# Altium PCB Probe.PcbDoc (part 1 of 2)
Units mil, origin at the board's own origin, x right, y up, seen from the top; angles counter-clockwise.
Board outline 2992.13 x 787.4 mil, 4 copper layers (Top, Ground, Signal/Power, Bottom), stack 59.68 mil thick; 57 components, 32 nets, 157 pads, 214 vias.
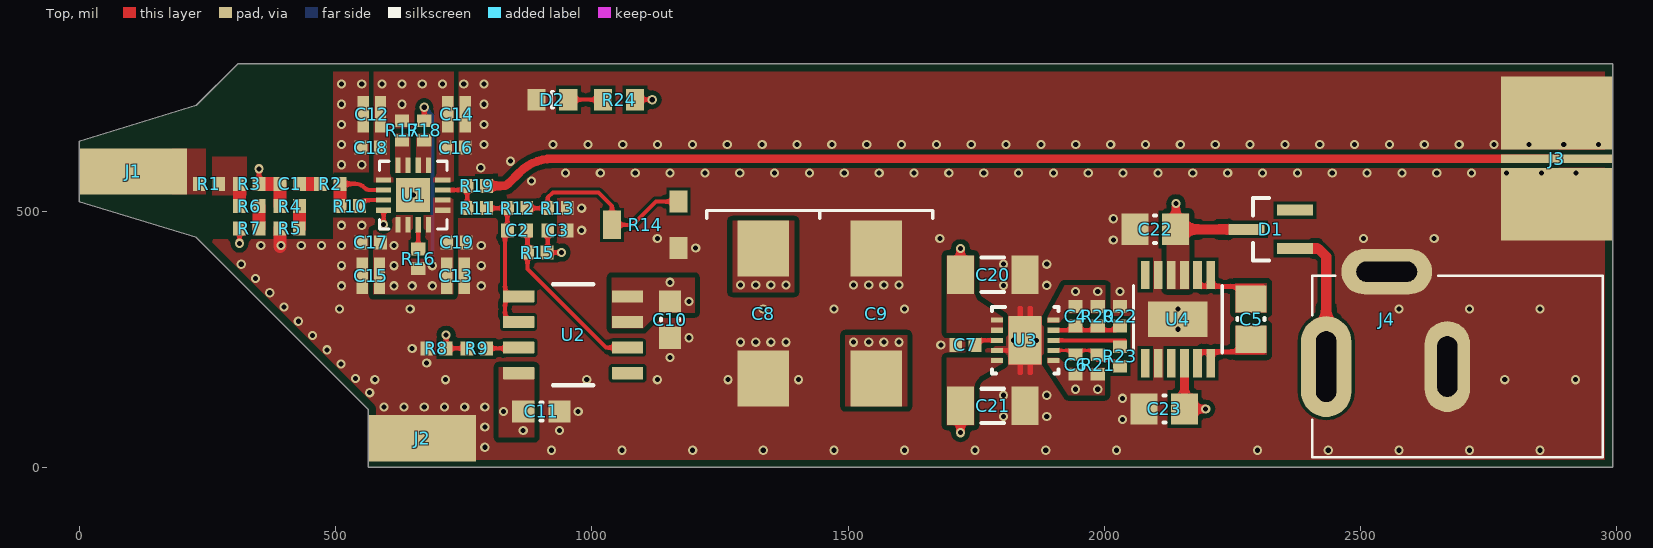
[diagram p0: Top view]
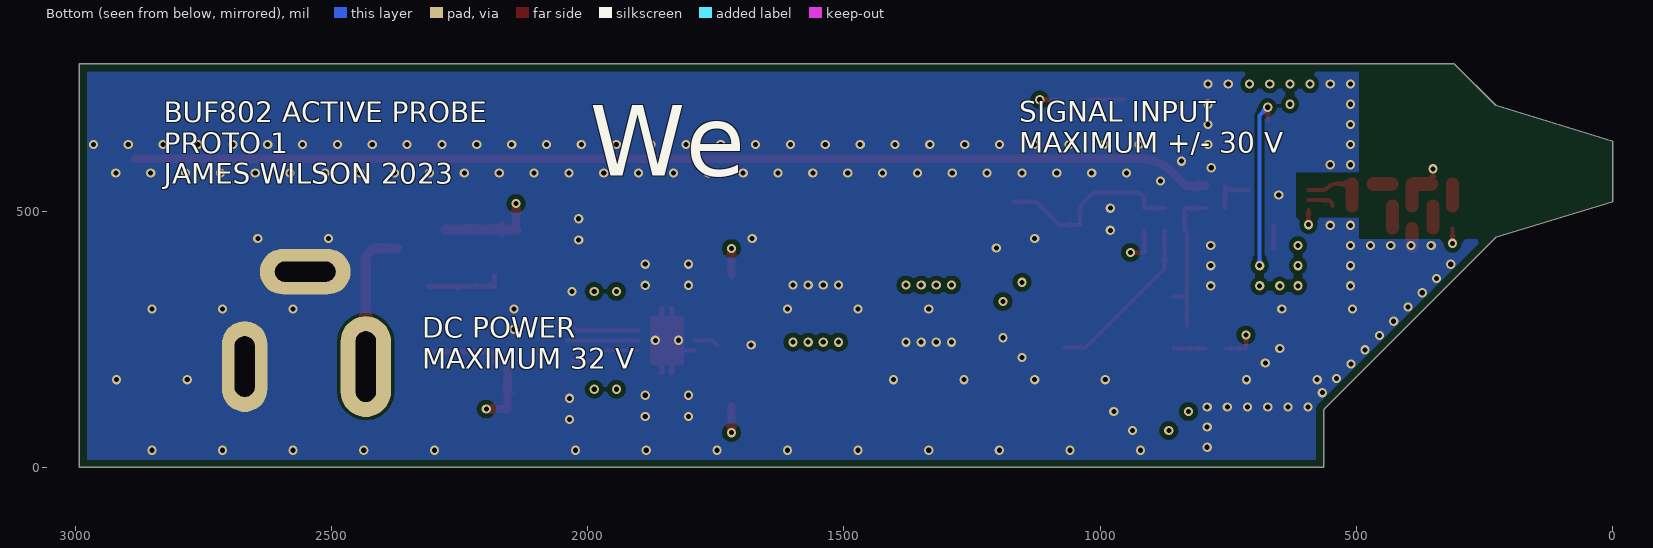
[diagram p1: Bottom view, seen from below]
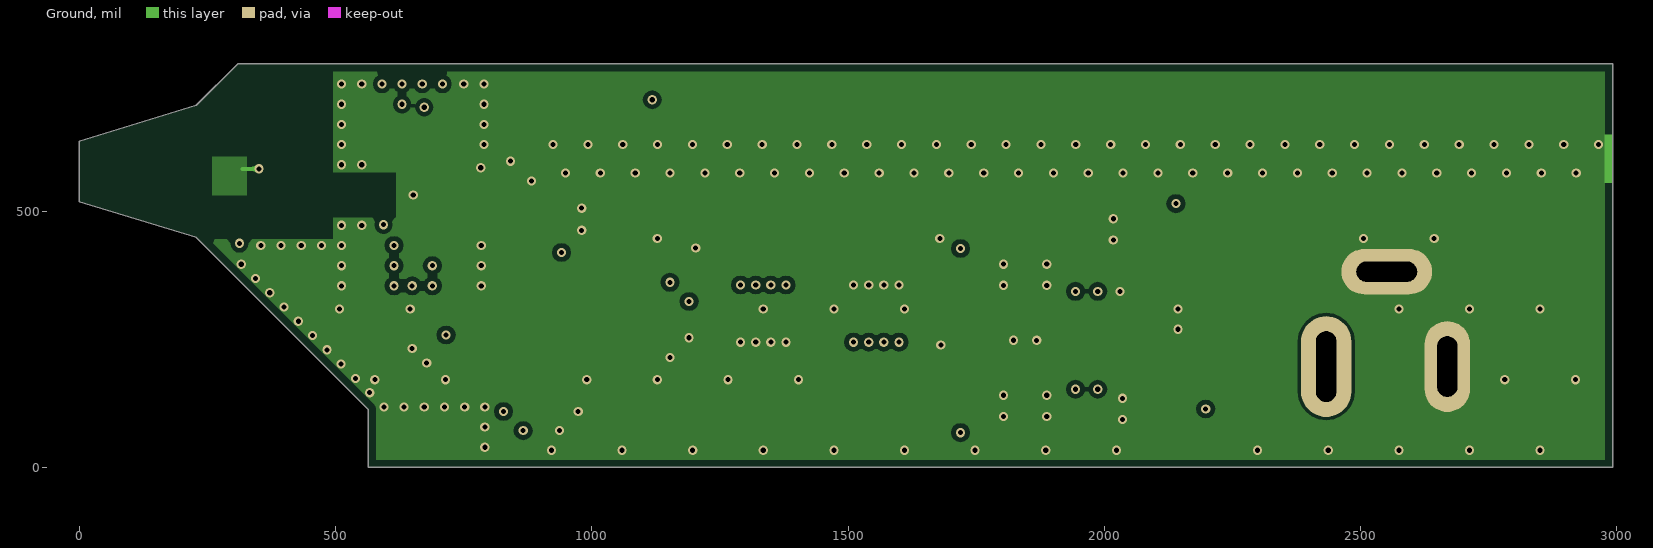
[diagram p2: Ground]
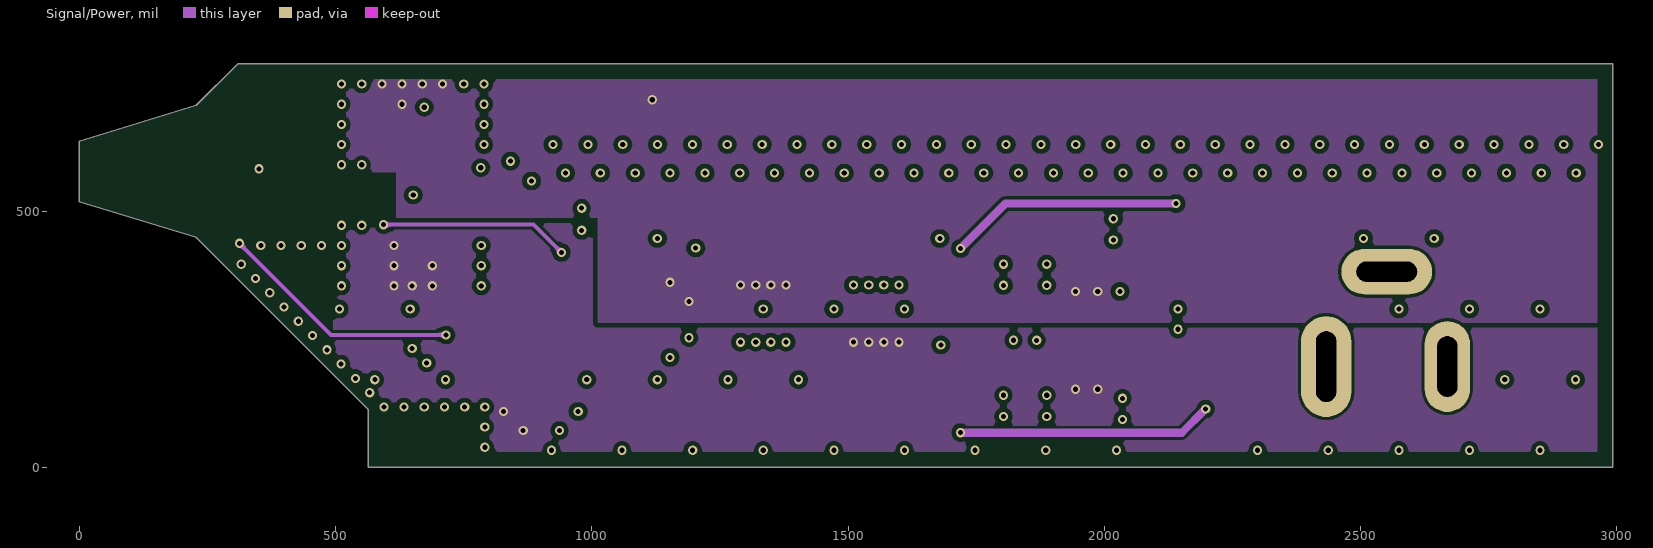
[diagram p3: Signal/Power]
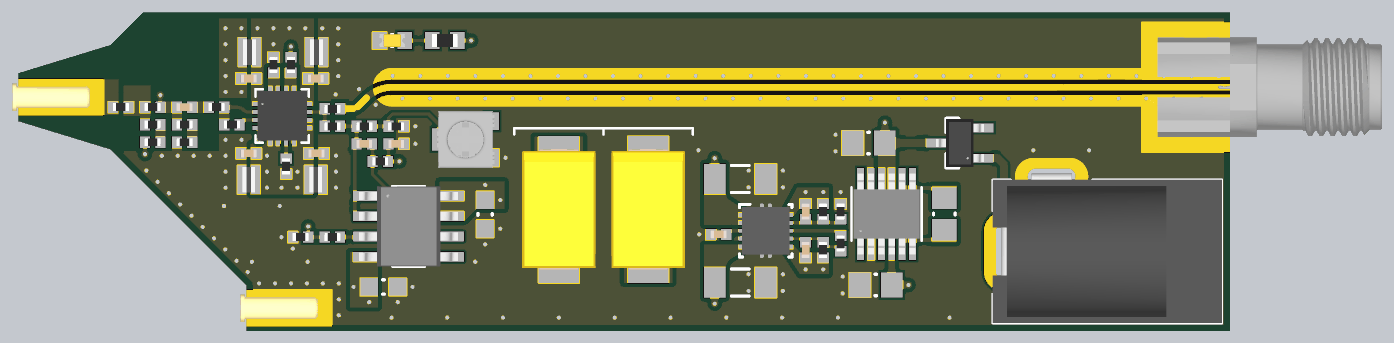
[diagram p4: 3D render of the assembled board from above, using the file's embedded part models]

## Layer stack, top to bottom
Top Solder: solder mask 1, Solder Resist, Dk 3.5
Top: signal copper 1.7
Dielectric 1: core 7.96, FR-4, Dk 3.68
Ground: signal copper 0.68
Dielectric 3: core 39, Dk 3.68
Signal/Power: signal copper 0.68
Dielectric 4: prepreg 7.96, Dk 3.68
Bottom: signal copper 1.7
Bottom Solder: solder mask 1, Solder Resist, Dk 3.5

## Board outline
0,518.7 0,636.81 228.35,706.69 309.06,787.4 2992.13,787.4 2992.13,0 563.98,0 563.98,113.19 228.35,448.82

## Design rules (kind name [scope] priority, off if disabled: settings)
BoardOutlineClearance BoardOutlineClearance_outer [OnCopper and OnOutside] p1: gap=15 ignorepadtopadclearanceinfootprint=FALSE except(0: SMDPad-OutlineEdge)
BoardOutlineClearance BoardOutlineClearance_L3 [OnLayer('Signal/Power')] p2: gap=30 ignorepadtopadclearanceinfootprint=FALSE
BoardOutlineClearance BoardOutlineClearance_inner [OnCopper and not OnOutside] p3: gap=15 ignorepadtopadclearanceinfootprint=FALSE except(0: Fill-OutlineEdge Region-OutlineEdge)
Clearance Clearance_RF_CPWG [InNet('NetJ3_1') vs InNet('GND')] p1: gap=6 ignorepadtopadclearanceinfootprint=FALSE except(10: Arc-Fill Arc-Poly Arc-Region Track-Fill Track-Poly Track-Region SMDPad-Fill SMDPad-Poly SMDPad-Region Fill-Fill Fill-Poly Fill-Region Poly-Poly Poly-Region Region-Region)
Clearance [All] p2: gap=6 ignorepadtopadclearanceinfootprint=FALSE except(10: Fill-Fill Fill-Poly Fill-Region Poly-Poly Poly-Region Region-Region; 13: Arc-Hole Track-Hole SMDPad-Hole THPad-Hole Via-Hole Fill-Hole Poly-Hole Region-Hole)
HoleSize [All] p1: absolutevalues=TRUE maxlimit=250 minlimit=10 maxpercent=80.000 minpercent=20.000
MinimumAnnularRing [All] p1: minimumring=4
MinimumSolderMaskSliver [All] p1: minsoldermaskwidth=4
PlaneConnect [All] p1: planeconnectstyle=Direct reliefexpansion=20 reliefentries=4 reliefconductorwidth=10 reliefairgap=10
PolygonConnect [All] p1: connectstyle=Direct reliefconductorwidth=10 reliefentries=4 polygonreliefangle="90 Angle" airgapwidth=10
RoutingVias [All] p1: holewidth=18 width=18 viastyle="Through Hole" minholewidth=8 minwidth=18 maxholewidth=28 maxwidth=50
SilkToSolderMaskClearance [IsPad] p1: minsilkscreentomaskgap=5 clearancetoexposedcopper=TRUE
SolderMaskExpansion [All] p1: expansion=2
Width [All] p1: maxlimit=200 minlimit=4 preferedwidth=10
26 further rules are at their usual default settings.

## Classes and differential pairs
component class Power: C4 C5 C6 C7 C8 C9 C10 C11 C12 C13 C14 C15 C16 C17 C18 C19 C20 C21 C22 C23 C? D1 D2 J4 R20 R21 R22 R23 R24 R? U3 U4 U?
component class Probe: C1 C2 C3 J1 J2 J3 R1 R2 R3 R4 R5 R6 R7 R8 R9 R10 R11 R12 R13 R14 R15 R16 R17 R18 R19 U1 U2

## Components (designator, comment, footprint, x,y, rotation, side; value= is the part's Value field where it differs from the comment)
C1 "330p" CAPC0402(1005)50_M 410.45,553.15 r0 top
C2 "100p" CAPC0402(1005)50_M 854.33,462.6 r0 top
C3 "100p" CAPC0402(1005)50_M 933.07,462.6 r0 top
C4 "10n" CAPC0402(1005)50_M 1943.9,295.28 r90 top
C5 "1u" CAPC0805(2012)145_M 2286.42,289.37 r270 top
C6 "10n" CAPC0402(1005)50_M 1943.9,200.79 r270 top
C7 "10n" CAPC0402(1005)50_M 1729.04,239.17 r180 top
C8 "22u" "KEMET D_M" 1334.65,300.2 r90 top
C9 "22u" "KEMET D_M" 1555.12,300.2 r90 top
C10 "100n" CAPC0603(1608)100_M 1152.56,288.39 r270 top
C11 "100n" CAPC0603(1608)100_M 901.57,109.25 r180 top
C12 "100n LICC" CAPC0306_M 570.87,688.98 r180 top
C13 "100n LICC" CAPC0306_M 734.25,374.02 r180 top
C14 "100n LICC" CAPC0306_M 736.22,688.98 r0 top
C15 "100n LICC" CAPC0306_M 568.9,374.02 r0 top
C16 "10n" CAPC0402(1005)50_M 734.25,624.02 r0 top
C17 "10n" CAPC0402(1005)50_M 568.9,438.98 r0 top
C18 "10n" CAPC0402(1005)50_M 568.9,624.02 r180 top
C19 "10n" CAPC0402(1005)50_M 736.22,438.98 r180 top
C20 "10u" CAPC1206(3216)170_M 1782.48,375.98 r0 top
C21 "10u" CAPC1206(3216)170_M 1782.48,120.08 r180 top
C22 "4.7u" CAPC0805(2012)100_M 2099.41,464.57 r180 top
C23 "4.7u" CAPC0805(2012)100_M 2117.13,114.17 r180 top
D1 "BAT54" INF-PG-SC59_M 2324.8,464.57 r180 top
D2 "VLMTG1300-GS08" LED0603(1608)_M 923.23,717.52 r0 top
J1 "0339-0-15-01-15-27-10-0" "MILL-MAX 0339" 0.31,577.76 r0 top
J2 "0339-0-15-01-15-27-10-0" "MILL-MAX 0339" 563.98,57.09 r0 top
J3 "901-10511-3" 901-10511-3 2992.13,602.36 r180 top
J4 "2.1/5.5mm" "CUI PJ-002A" 2433.07,196.85 r0 top
R1 "82" RESC0402(1005)_M 253.15,553.15 r0 top
R2 "100" RESC0402(1005)_M 489.57,553.15 r0 top
R3 "1.60M" RESC0402(1005)_M 331.69,553.15 r0 top
R4 "200K" RESC0402(1005)_M 410.45,509.84 r0 top
R5 "200K" RESC0402(1005)_M 410.43,466.54 r180 top
R6 "976K" RESC0402(1005)_M 331.69,509.84 r0 top
R7 "953K" RESC0402(1005)_M 331.69,466.54 r180 top
R8 "66.5k" RESC0402(1005)_M 696.85,232.28 r180 top value=66.5K
R9 "68" RESC0402(1005)_M 775.59,232.28 r0 top
R10 "10.0M" RESC0402(1005)_M 527.56,509.84 r0 top
R11 "51.0K" RESC0402(1005)_M 775.59,505.91 r180 top
R12 "10.0K" RESC0402(1005)_M 854.33,505.91 r0 top
R13 "390" RESC0402(1005)_M 933.07,505.91 r0 top
R14 "1k" PVG3A 1104.33,473.43 r90 top
R15 "2.00K" RESC0402(1005)_M 893.7,419.29 r180 top
R16 "17.8k" RESC0402(1005)_M 661.42,407.18 r270 top value=17.8K
R17 "1.00K" RESC0402(1005)_M 629.92,657.48 r90 top
R18 "1.00K" RESC0402(1005)_M 673.23,657.48 r90 top
R19 "49.9" RESC0402(1005)_M 775.59,549.21 r0 top
R20 "41.2k" RESC0402(1005)_M 1987.2,295.28 r270 top value=41.2K
R21 "91.0K" RESC0402(1005)_M 1987.2,200.79 r270 top
R22 "10.2k" RESC0402(1005)_M 2030.51,295.28 r90 top value=10.2K
R23 "18.0K" RESC0402(1005)_M 2030.51,216.54 r90 top
R24 "3.00K" RESC0603(1608)_M 1053.15,717.52 r180 top
U1 "BUF802" "VQFN16_RGT_TEX- OSHPARK" 651.57,531.49 r0 top
U2 "ADA4625" SOIC-8 963.58,258.86 r0 top
U3 "TPS7A39" DSC0010J_NV 1845.47,248.03 r0 top
U4 "LTC3261" MSOP-12_MSE 2143.7,289.37 r90 top

## Footprints (in the part's own frame and the unit in brackets; to place one, negate y for a bottom-side part, rotate by r counter-clockwise, add the part's x,y. Pads: shape width x height; smd on the part's side, far side on the other; paste and mask are expansions set on the pad)
901-10511-3 [mil] "901-10511-3"
  rect 218x16 smd paste-1000: 1(109,0)
  rect 218x142 smd paste-1000: 2(109,89) 2(109,-89)
  body extent -375,-124 179,124, height 127
CAPC0306_M [mm] "CAPC0306(0510)_M"
  rect 0.56x1.81 smd: 1(-0.43,0) 2(0.43,0)
  body extent -0.4,-0.8 0.4,0.8, height 0.55
CAPC0402(1005)50_M [mm] "Chip Capacitor, Body 1.0x0.5mm, Height 0.5mm, IPC Low  Density"
  rect 0.635x0.7 smd: 1(-0.483,0) 2(0.483,0)
  body extent -0.5,-0.25 0.5,0.25, height 0.5
CAPC0603(1608)100_M [mm] "Chip Capacitor, Body 1.6x0.8mm, Height 1.0mm, IPC Low Density"
  rect 1.1x1.1 smd: 1(-0.9,0) 2(0.9,0)
  silkscreen extent -0.05,-0.45 0.05,0.45, body extent -0.87,-0.48 0.88,0.48, height 1
CAPC0805(2012)100_M [mm] "Chip Capacitor, Body 2.0x1.2mm, Height 1.0mm, IPC Low Density"
  rect 1.35x1.55 smd: 1(-1,0) 2(1,0)
  silkscreen extent -0.05,-0.67 0.05,0.67, body extent -1.1,-0.73 1.1,0.73, height 1
CAPC0805(2012)145_M [mm] "Chip Capacitor, Body 2.0x1.2mm, Height 1.45mm, IPC Low Density"
  rect 1.35x1.55 smd: 1(-1,0) 2(1,0)
  silkscreen extent -0.05,-0.67 0.05,0.67, body extent -1.1,-0.72 1.1,0.72, height 1.45
CAPC1206(3216)170_M [mm] "Chip Capacitor, Body 3.2x1.6mm, Height 1.7mm, IPC Low Density"
  rect 1.35x1.9 smd: 1(-1.6,0) 2(1.6,0)
  silkscreen extent -0.55,-0.85 0.55,0.85, body extent -1.7,-0.9 1.7,0.9, height 1.7
"CUI PJ-002A" [mm] "CUI PJ-002A 2.1/5.5mm barrel jack"
  oval 2.5x5 hole 1 slot 3.5 at 90 deg: 1(0,0)
  oval 2.25x4.5 hole 1 slot 3 at 90 deg: 2(6,0)
  oval 4.5x2.25 hole 1 slot 3 at 0 deg: 3(3,4.7)
  silkscreen extent -0.7,-4.5 13.7,4.5, body extent -0.7,-4.5 13.7,4.9, height 11
DSC0010J_NV [mm]
  rect 0.6x0.25 smd: 1(-1.4,1) 2(-1.4,0.5) 3(-1.4,0) 4(-1.4,-0.5) 5(-1.4,-1) 6(1.4,-1) 7(1.4,-0.5) 8(1.4,0) 9(1.4,0.5) 10(1.4,1)
  rect 1.65x2.4 smd paste-1.187 mask-1.181: 11(0,0)
  Top region: -0.325,-1.7 -0.375,-1.65 -0.375,-1.2 -0.775,-1.2 -0.825,-1.15 -0.825,1.15 -0.775,1.2 -0.375,1.2 -0.375,1.65 -0.325,1.7 -0.325,1.7 -0.175,1.7 -0.175,1.7 -0.125,1.65 -0.125,1.2 0.125,1.2 0.125,1.65 0.175,1.7 0.175,1.7 0.325,1.7 0.325,1.7 0.375,1.65 0.375,1.2 0.775,1.2 0.825,1.15 0.825,-1.15 0.775,-1.2 0.375,-1.2 0.375,-1.65 0.325,-1.7 0.175,-1.7 0.125,-1.65 0.125,-1.2 -0.125,-1.2 -0.125,-1.65 -0.175,-1.7
  silkscreen extent -1.65,-1.65 1.65,1.65, body extent -1.5,-1.5 1.5,1.5, height 0.8
INF-PG-SC59_M [mm] "SOT23, 3-Leads, Body 3x1.53mm, Pitch 0.95mm, IPC Low Density"
  rect 1.8x0.55 smd: 1(-1.2,0.95) 2(-1.2,-0.95) 3(1.2,0)
  silkscreen extent 0.07,-1.55 0.88,1.55, body extent -1.5,-1.51 1.5,1.51, height 1.25
"KEMET D_M" [mm] "KEMET D (most)"
  rect 2.77x2.55 smd: 1(3.22,0) 2(-3.22,0)
  silkscreen extent 4.71,-2.8 5.11,2.8, body extent -3.8,-2.3 3.8,2.3, height 3.1
LED0603(1608)_M [mm] "Chip Resistor, Body 1.6x0.8mm, IPC Low Density"
  rect 0.908x1.079 smd: 1(0.79,0) 2(-0.79,0)
  silkscreen extent -0.05,-0.4 0.05,0.4, body extent -0.8,-0.4 0.8,0.4, height 0.8
"MILL-MAX 0339" [mil] "MILL-MAX 0339"
  rect 210x90 smd paste-1000: 1(105,0)
  body extent -15,-34 175,34, height 61
MSOP-12_MSE [mil]
  rect 55x17 smd: 1(-86,64) 2(-86,38.4) 3(-86,12.8) 4(-86,-12.8) 5(-86,-38.4) 6(-86,-64) 7(86,-64) 8(86,-38.4) 9(86,-12.8) 10(86,12.8) 11(86,38.4) 12(86,64)
  rect 69x116 smd paste-57.5: EPAD(0,0)
  silkscreen extent -66,-86 66,86, body extent -99,-81 99,81, height 43
PVG3A [mm] "SMD Sealed Type Single-Turn PVG3"
  rect 1.1x0.9 smd: 1(1.15,-1.65) 3(-1.15,-1.65)
  rect 1.4x0.9 smd: 2(0,1.65)
  body extent -1.8,-1.8 1.8,1.8, height 1.94
RESC0402(1005)_M [mm] "Chip Resistor, Body 1.0x0.5mm, IPC Low Density"
  rect 0.635x0.7 smd: 1(-0.483,0) 2(0.482,0)
  body extent -0.5,-0.25 0.5,0.25, height 0.35
RESC0603(1608)_M [mm] "Chip Resistor, Body 1.6x0.8mm, IPC Low Density"
  rect 0.908x1.079 smd: 1(-0.79,0) 2(0.79,0)
  body extent -0.8,-0.4 0.8,0.4, height 0.45
SOIC-8 [mm] "SOIC-8"
  rrect8% 1.55x0.6 smd: 1(-2.7,1.905) 2(-2.7,0.635) 3(-2.7,-0.635) 4(-2.7,-1.905) 5(2.7,-1.905) 6(2.7,-0.635) 7(2.7,0.635) 8(2.7,1.905)
  silkscreen extent -1,-2.5 1,2.5, body extent -3.1,-2.5 3.1,2.5, height 1.76
"VQFN16_RGT_TEX- OSHPARK" [mil]
  rect 30x10 smd: 1(-58,29.54) 2(-58,9.85) 3(-58,-9.85) 4(-58,-29.53) 9(58,-29.53) 10(58,-9.85) 11(58,9.85) 12(58,29.54)
  rect 10x30 smd: 5(-29.53,-58) 6(-9.85,-58) 7(9.85,-58) 8(29.54,-58) 13(29.54,58) 14(9.85,58) 15(-9.85,58) 16(-29.53,58)
  rect 66.14x66.14 smd: 17(0,0)
  silkscreen extent -66,-66 66,66, body extent -61,-61 61,61, height 39

## Part data
C1: library part GRM1555C1H331JA01, "CAP CER 330PF±5% 50V C0G 0402", Capacitance=330pF, Manufacturer=Murata, Manufacturer Part Number=GRM1555C1H331JA01D, Temperature Coefficient=C0G, Tolerance=±5%, Part Number=GRM1555C1H331JA01
C2 C3: library part CL05C101JB5NNN, "CAP CER 100PF±5% 50V C0G 0402", Capacitance=100pF, Manufacturer="Samsung Electro-Mechanics", Manufacturer Part Number=CL05C101JB5NNNC, Temperature Coefficient=C0G, Tolerance=±5%, Voltage Rating=50V, Part Number=CL05C101JB5NNN
C4 C6 C7: library part GRM1555C1E103JE01, "CAP CER 10NF±5% 25V C0G 0402", Capacitance=10nF, Manufacturer=Murata, Manufacturer Part Number=GRM1555C1E103JE01D, Temperature Coefficient=C0G, Tolerance=±5%, Part Number=GRM1555C1E103JE01
C5: library part CC0805KKX7R9BB105, "Cap Ceramic 1uF 50V X7R 10% SMD 0805 125C Blister T/R", Capacitance=1uF, Case/Package=0805, Case Code (Metric)=2012, Dielectric=X7R, Manufacturer=Yageo, Max Operating Temperature=125°C, Min Operating Temperature=-55°C, Supplier Part Number 1=311-1886-1-ND, Tolerance=10%, Voltage Rating=50V, Case Code (Imperial)=0805, ComponentLink1Description=http://www.mouser.com/ds/2/447/Yageo_UPY-GP_NP0_16V-to-50V_9-358835.pdf?src-supplier=Mouser, ComponentLink1URL=http://www.mouser.com/ds/2/447/Yageo_UPY-GP_NP0_16V-to-50V_9-358835.pdf?src-supplier=Mouser, Composition=Ceramic, Depth=1.25mm, Halogen Free="Halogen Free", Height=1.25mm, Lead Free="Lead Free", Length=2mm, Manufacturer Part Number=CC0805KKX7R9BB105, Mount="Surface Mount", Packaging="Tape and Reel", Pricing 1="1=0.27, 10=0.188, 100=0.1064, 500=0.0751, 1000=0.06571 (USD)", Radiation Hardening=No, Stock 1=558291, Supplier 1=Digi-Key, Supplier 2=Mouser, Supplier Part Number 2=603-CC805KKX7R9BB105, Termination=SMD/SMT, Thickness=0.057inch, Voltage Rating (DC)=50V, Weight=0.000194oz, Width=0.049inch
C8 C9: library part T491D226K016AT, "CAP TANT 22UF 10% 16V 2917", Capacitance=22uF, Case/Package=2917, Case Code (Metric)=7343, Dielectric Material=Tantalum, ESR (Equivalent Series Resistance)=800mR, Leakage Current=3.6uA, Manufacturer=KEMET, Max Operating Temperature=125°C, Min Operating Temperature=-55°C, Package Quantity=500, Ripple Current=433mA, Supplier Part Number 1=399-3780-6-ND, Tolerance=20%, Voltage=16V, Case Code (Imperial)=2917, ComponentLink1Description=https://datasheet.ciiva.com/34302/1574321-34302540.pdf?src-supplier=Jameco, ComponentLink1URL=https://datasheet.ciiva.com/34302/1574321-34302540.pdf?src-supplier=Jameco, ComponentLink2Description=https://datasheet.ciiva.com/259/kem-t2005-t491-259126.pdf?src-supplier=Digi-Key, ComponentLink2URL=https://datasheet.ciiva.com/259/kem-t2005-t491-259126.pdf?src-supplier=Digi-Key, ComponentLink3Description=https://datasheet.ciiva.com/11793/0900766b80718482-11793767.pdf?src-supplier=Rs, ComponentLink3URL=https://datasheet.ciiva.com/11793/0900766b80718482-11793767.pdf?src-supplier=Rs, ComponentLink4Description=https://datasheet.ciiva.com/5934/kem-t2005-t491-5934828.pdf?src-supplier=Farnell, ComponentLink4URL=https://datasheet.ciiva.com/5934/kem-t2005-t491-5934828.pdf?src-supplier=Farnell, ComponentLink5Description=https://datasheet.ciiva.com/8079/kem-t2005-t491-8079802.pdf?src-supplier=Element14, ComponentLink5URL=https://datasheet.ciiva.com/8079/kem-t2005-t491-8079802.pdf?src-supplier=Element14, ComponentLink6Description=https://datasheet.ciiva.com/32431/t491serie-eng-tds-32431607.pdf?src-supplier=Distrelec, ComponentLink6URL=https://datasheet.ciiva.com/32431/t491serie-eng-tds-32431607.pdf?src-supplier=Distrelec, ComponentLink7Description=https://datasheet.ciiva.com/7696/1854511-7696357.pdf?src-supplier=Element14, ComponentLink7URL=https://datasheet.ciiva.com/7696/1854511-7696357.pdf?src-supplier=Element14, ComponentLink8Description=https://datasheet.ciiva.com/259/kem-t2005-t491-259127.pdf?src-supplier=Digi-Key, ComponentLink8URL=https://datasheet.ciiva.com/259/kem-t2005-t491-259127.pdf?src-supplier=Digi-Key, ComponentLink9Description=https://datasheet.ciiva.com/259/kem-t2005-t491-259128.pdf?src-supplier=Digi-Key, ComponentLink9URL=https://datasheet.ciiva.com/259/kem-t2005-t491-259128.pdf?src-supplier=Digi-Key, ComponentLink10Description=https://datasheet.ciiva.com/14610/70095774-14610140.pdf?src-supplier=Allied+Electronics, ComponentLink10URL=https://datasheet.ciiva.com/14610/70095774-14610140.pdf?src-supplier=Allied+Electronics, ComponentLink11Description=https://datasheet.ciiva.com/12883/kem-t2005-t491-12883292.pdf?src-supplier=Mouser, ComponentLink11URL=https://datasheet.ciiva.com/12883/kem-t2005-t491-12883292.pdf?src-supplier=Mouser, Construction=Flat, Depth=4.3mm, Dissipation Factor=6%, Features="General Purpose", Height=2.8mm, Height - Seated (Max)=0.122inch, Lead Free="Lead Free", Length=7.3mm, Life (Hours)=2000Hour, Manufacturer Part Number=T491D226K016AT, Mount="Surface Mount,PCB", Packaging="Tape and Reel", Polarity=Polar, Pricing 1="1=0.96, 10=0.726, 50=0.6034, 100=0.5197 (USD)", Radiation Hardening=No, Reach SVHC Compliant=Yes, RoHS Compliant=Yes, Series=T491, Stock 1=26983, Supplier 1=Digi-Key, Supplier 2=Mouser, Supplier Part Number 2=80-T491D226K016, Termination=SMD/SMT, Voltage Rating=16V, Voltage Rating (DC)=16V, Width=4.3mm
C10 C11: library part CC0603KRX7R9BB104, "CAPACITOR CERAMIC, 0.1UF, 50V, X7R, 10%, 0603", Capacitance=100nF, Case/Package=0603, Case Code (Metric)=1608, Dielectric=X7R, Dielectric Material=Ceramic, LCSC PART #=C14663, Manufacturer=Yageo, Max Operating Temperature=125°C, Min Operating Temperature=-55°C, Package Quantity=1, Supplier Part Number 1=311-1344-1-ND, Tolerance=10%, Voltage=50V, Case Code (Imperial)=0603, ComponentLink1Description=http://www.yageo.com/documents/recent/UPY-GPHC_X7R_6.3V-to-50V_18.pdf?src-supplier=Digi-Key, ComponentLink1URL=http://www.yageo.com/documents/recent/UPY-GPHC_X7R_6.3V-to-50V_18.pdf?src-supplier=Digi-Key, ComponentLink2Description=http://www.farnell.com/datasheets/1489800.pdf?src-supplier=Element14, ComponentLink2URL=http://www.farnell.com/datasheets/1489800.pdf?src-supplier=Element14, ComponentLink3Description=http://www.yageo.com/documents/recent/UPY-GPHC_X7R_6.3V-to-50V_8.pdf?src-supplier=Avnet+Europe, ComponentLink3URL=http://www.yageo.com/documents/recent/UPY-GPHC_X7R_6.3V-to-50V_8.pdf?src-supplier=Avnet+Europe, ComponentLink4Description=http://www.farnell.com/datasheets/2167236.pdf?src-supplier=Element14, ComponentLink4URL=http://www.farnell.com/datasheets/2167236.pdf?src-supplier=Element14, ComponentLink5Description=http://www.farnell.com/datasheets/1489800.pdf?src-supplier=Farnell, ComponentLink5URL=http://www.farnell.com/datasheets/1489800.pdf?src-supplier=Farnell, Depth=0.8mm, Halogen Free="Halogen Free", Height=0.8mm, Lead Free="Lead Free", Length=1.6mm, Manufacturer Part Number=CC0603KRX7R9BB104, Mount="Surface Mount", Number of Pins=2, Packaging="Tape and Reel", Pricing 1="1=0.1, 10=0.066, 50=0.036, 100=0.0293, 500=0.02094, 1000=0.01646 (USD)", Radiation Hardening=No, REACH SVHC="No SVHC", Stock 1=0, Supplier 1=Digi-Key, Supplier 2=Mouser, Supplier Part Number 2=603-CC603KRX7R9BB104, Termination=SMD/SMT, Thickness=0.035inch, Voltage Rating=50V, Width=0.031inch
C12 C13 C14 C15: library part TWK107B7104MVHT, "CAP CER 0.1UF 25V X7R 0306", Capacitance=100nF, Case/Package=0306, Case Code (Metric)=0816, Manufacturer="Taiyo Yuden", Max Operating Temperature=125°C, Min Operating Temperature=-55°C, Ratings=AEC-Q200, Supplier Part Number 1=587-6181-1-ND, Tolerance=20%, Voltage Rating=25V, Case Code (Imperial)=0306, ComponentLink1Description=http://ds.yuden.co.jp/TYCOMPAS/ut/detail.do?productNo=TWK107B7104MVHT&amp;fileName=TWK107B7104MVHT_SS&amp;mode=specSheetDownload&src-supplier=Digi-Key, ComponentLink1URL=http://ds.yuden.co.jp/TYCOMPAS/ut/detail.do?productNo=TWK107B7104MVHT&amp;fileName=TWK107B7104MVHT_SS&amp;mode=specSheetDownload&src-supplier=Digi-Key, ComponentLink2Description="https://ds.yuden.co.jp/TYCOMPAS/ut/detail?pn=TWK107B7104MVHT &amp;u=M&src-supplier=Digi-Key", ComponentLink2URL="https://ds.yuden.co.jp/TYCOMPAS/ut/detail?pn=TWK107B7104MVHT &amp;u=M&src-supplier=Digi-Key", Manufacturer Part Number=TWK107B7104MVHT, Mount="Surface Mount", Packaging="Tape and Reel", Pricing 1="1=0.31, 10=0.219, 50=0.153, 100=0.1312, 500=0.0984, 1000=0.08309 (USD)", RoHS Compliant=Yes, Stock 1=9611, Supplier 1=Digi-Key, Supplier 2=Mouser, Supplier Part Number 2=963-TWK107B7104MVHT
C16 C17 C18 C19: library part GRM155R71H103KA88, "CAP CER 10NF±10% 50V X7R 0402", Capacitance=10nF, Manufacturer=Murata, Manufacturer Part Number=GRM155R71H103KA88D, Temperature Coefficient=X7R, Tolerance=±10%, Part Number=GRM155R71H103KA88
C20 C21: library part CL31B106KBHNNNE, "CAP CER 10UF 50V X7R 1206", Capacitance=10uF, Case/Package=1206, Case Code (Metric)=3216, Dielectric=X7R, LCSC PART #=C89632, Manufacturer=Samsung, Max Operating Temperature=125°C, Min Operating Temperature=-55°C, Supplier Part Number 1=1276-6767-1-ND, Tolerance=10%, Voltage Rating=50V, Case Code (Imperial)=1206, ComponentLink1Description=http://www.samsungsem.com/kr/support/product-search/mlcc/CL31B106KBHNNNE.jsp?src-supplier=Digi-Key, ComponentLink1URL=http://www.samsungsem.com/kr/support/product-search/mlcc/CL31B106KBHNNNE.jsp?src-supplier=Digi-Key, Lead Free="Lead Free", Length=0.126inch, Manufacturer Part Number=CL31B106KBHNNNE, Mount="Surface Mount", Packaging="Tape and Reel", Pricing 1="1=0.42, 10=0.292, 100=0.1754, 500=0.13158, 1000=0.1111 (USD)", Stock 1=146990, Supplier 1=Digi-Key, Thickness=0.071inch, Voltage Rating (DC)=50V, Width=0.063inch
C22 C23: library part GRM21BZ71H475KE15K, "CAP CER 4.7UF 50V X7R 0805", Manufacturer=Murata, Supplier Part Number 1=490-GRM21BZ71H475KE15KCT-ND, ComponentLink1Description=https://datasheet.octopart.com/GRM21BZ71H475KE15K-Murata-datasheet-149523520.pdf?src-supplier=Newark, ComponentLink1URL=https://datasheet.octopart.com/GRM21BZ71H475KE15K-Murata-datasheet-149523520.pdf?src-supplier=Newark, ComponentLink2Description=https://datasheet.octopart.com/GRM21BZ71H475KE15K-Murata-datasheet-165579666.pdf?src-supplier=TME, ComponentLink2URL=https://datasheet.octopart.com/GRM21BZ71H475KE15K-Murata-datasheet-165579666.pdf?src-supplier=TME, Manufacturer Part Number=GRM21BZ71H475KE15K, Pricing 1="1=0.6, 10=0.444, 50=0.3554, 100=0.3047, 500=0.2412, 1000=0.20311, 2500=0.19042, 5000=0.17772 (USD)", RoHS Compliant=Yes, Stock 1=134344, Supplier 1=Digi-Key, Supplier 2=Mouser, Supplier Part Number 2=81-GRM21BZ71H475KE5K
D1: "DIODE SCHOTTKY 30V 200MA TO236AB", Manufacturer="Nexperia USA", Manufacturer Part Number=BAT54,215, Supplier Part Number 1=1727-2900-6-ND, Stock 1=0, Supplier 1=Digi-Key
D2: "LED GREEN 0603 SMD", Case/Package=0603, Case Code (Metric)=1608, Color=Green, Forward Current=20mA, Forward Voltage=3.2V, Manufacturer="Vishay Semiconductors", Max Operating Temperature=85°C, Max Power Dissipation=76mW, Min Operating Temperature=-35°C, Package Quantity=1, Power Rating=75mW, Supplier Part Number 1=VLMTG1300-GS08CT-ND, Case Code (Imperial)=0603, ComponentLink1Description=https://datasheet.ciiva.com/26322/vlmo1300-26322149.pdf?src-supplier=Element14, ComponentLink1URL=https://datasheet.ciiva.com/26322/vlmo1300-26322149.pdf?src-supplier=Element14, ComponentLink2Description=https://datasheet.ciiva.com/8028/vlmo1300-8028077.pdf?src-supplier=Element14, ComponentLink2URL=https://datasheet.ciiva.com/8028/vlmo1300-8028077.pdf?src-supplier=Element14, ComponentLink3Description=https://datasheet.ciiva.com/16510/vlmo1300-16510989.pdf?src-supplier=Future+Electronics, ComponentLink3URL=https://datasheet.ciiva.com/16510/vlmo1300-16510989.pdf?src-supplier=Future+Electronics, ComponentLink4Description=https://datasheet.ciiva.com/2115/vlmo1300-2115107.pdf?src-supplier=Digi-Key, ComponentLink4URL=https://datasheet.ciiva.com/2115/vlmo1300-2115107.pdf?src-supplier=Digi-Key, ComponentLink5Description=https://datasheet.ciiva.com/2115/vlmo1300-2115108.pdf?src-supplier=Digi-Key, ComponentLink5URL=https://datasheet.ciiva.com/2115/vlmo1300-2115108.pdf?src-supplier=Digi-Key, ComponentLink6Description=https://datasheet.ciiva.com/2115/vlmo1300-2115106.pdf?src-supplier=Digi-Key, ComponentLink6URL=https://datasheet.ciiva.com/2115/vlmo1300-2115106.pdf?src-supplier=Digi-Key, Contact Plating=Tin,Matte, Depth=0.8mm, Dominant Wavelength=525nm, Height=0.8mm, Illumination Color=Green, Lead Free="Lead Free", Length=1.6mm, Lens Style=Rectangular,Clear, Luminous Intensity=450mcd, Manufacturer Part Number=VLMTG1300-GS08, Mount="Surface Mount", Number of Elements=1, Number of LEDs=1, Number of Pins=2, Packaging="Tape and Reel", Power Dissipation=76mW, Pricing 1="1=0.46, 10=0.305, 100=0.2033, 500=0.1406, 1000=0.11716 (USD)", Radiation Hardening=No, RoHS Compliant=Yes, Series=CHipLED, Stock 1=156996, Supplier 1=Digi-Key, Supplier 2=Mouser, Supplier Part Number 2=78-VLMTG1300-GS08, Test Current=20mA, Viewing Angle=130°, Wavelength=525nm, Width=0.8mm
J1 J2: "CONN PIN RCPT", Manufacturer=Mill-Max, Max Operating Temperature=125°C, Min Operating Temperature=-55°C, Supplier Part Number 1=0339-0-15-01-15-27-10-0-ND, ComponentLink1Description=https://www.mill-max.com/assets/pdfs/172.pdf?src-supplier=Digi-Key, ComponentLink1URL=https://www.mill-max.com/assets/pdfs/172.pdf?src-supplier=Digi-Key, ComponentLink2Description=https://datasheet.octopart.com/0339-0-15-01-15-27-10-0-Mill-Max-datasheet-26446830.pdf?src-supplier=Future+Electronics, ComponentLink2URL=https://datasheet.octopart.com/0339-0-15-01-15-27-10-0-Mill-Max-datasheet-26446830.pdf?src-supplier=Future+Electronics, ComponentLink3Description=http://www.mouser.com/ds/2/273/172M-276194.pdf?src-supplier=Mouser, ComponentLink3URL=http://www.mouser.com/ds/2/273/172M-276194.pdf?src-supplier=Mouser, ComponentLink4Description=https://datasheet.octopart.com/0339-0-15-01-15-27-10-0-Mill-Max-datasheet-155663258.pdf?src-supplier=Sager+Electronics, ComponentLink4URL=https://datasheet.octopart.com/0339-0-15-01-15-27-10-0-Mill-Max-datasheet-155663258.pdf?src-supplier=Sager+Electronics, Contact Material=Copper, Contact Plating=Gold, Manufacturer Part Number=0339-0-15-01-15-27-10-0, Packaging=Bulk, Pricing 1="1=1.42, 10=1.234, 25=1.1812, 50=1.155, 100=1.1025, 250=0.99748, 500=0.91874, 1000=0.7875, 2500=0.735 (USD)", RoHS Compliant=No, Series=0339, Stock 1=989, Supplier 1=Digi-Key, Supplier 2=Mouser, Supplier Part Number 2=575-0339015011527100, Termination=Solder
J3: "CONN SMA JACK STR 50OHM EDGE MNT", Case/Package=SMA, Manufacturer="Amphenol RF", Max Frequency=26.5GHz, Max Operating Temperature=165°C, Min Operating Temperature=-65°C, Supplier Part Number 1=ARF2500-ND, Voltage Rating=170V, ComponentLink1Description=https://datasheet.octopart.com/901-10511-3-Amphenol-RF-datasheet-67291285.pdf?src-supplier=Element14, ComponentLink1URL=https://datasheet.octopart.com/901-10511-3-Amphenol-RF-datasheet-67291285.pdf?src-supplier=Element14, ComponentLink2Description=https://datasheet.octopart.com/901-10511-3-Amphenol-RF-datasheet-67291280.pdf?src-supplier=Newark, ComponentLink2URL=https://datasheet.octopart.com/901-10511-3-Amphenol-RF-datasheet-67291280.pdf?src-supplier=Newark, ComponentLink3Description=http://www.amphenolrf.com/media/downloads/7776/C901-10511-3.pdf?src-supplier=Digi-Key, ComponentLink3URL=http://www.amphenolrf.com/media/downloads/7776/C901-10511-3.pdf?src-supplier=Digi-Key, Connector Type=SMA, Contact Material=Copper, Fastening Type=Threaded, Impedance=50R, Manufacturer Part Number=901-10511-3, Mount=Edge,Board, Packaging=Bulk, Pricing 1="1=9.78, 10=8.804, 25=8.2936, 50=8.081, 100=7.8684, 250=7.01772, 500=6.59242, 1000=5.82685 (USD)", RoHS Compliant=Yes, Series=-, Stock 1=1568, Supplier 1=Digi-Key, Supplier 2=Mouser, Supplier Part Number 2=523-901-10511-3, Termination=Solder
J4: library part PJ-002A, "CONN PWR JACK 2X5.5MM SOLDER", Color=Black, Current Rating=2.5A, Flammability Rating="UL94 V-0", Insulation Resistance=50MR, Manufacturer=CUI, Max Operating Temperature=85°C, Min Operating Temperature=-25°C, Package Quantity=500, Supplier Part Number 1=CP-002A-ND, Voltage Rating=24V, Connector Type=Jack, Contact Gender=Male, Contact Material="Copper Alloy,Copper", Contact Plating=Tin,Nickel, Diameter=2.1mm, Gender=Male, Housing Color=Black, Housing Material=Thermoplastic, Lead Free="Lead Free", Manufacturer Part Number=PJ-002A, Mount="Through Hole", Number of Conductors=2, Orientation=Horizontal, Packaging=Bulk, Pricing 1="1=0.6, 10=0.558, 25=0.5024, 50=0.4464, 100=0.4278, 250=0.3906, 500=0.372, 1000=0.3069, 2500=0.279 (USD)", Shielding=Unshielded, Stock 1=60290, Supplier 1=Digi-Key, Supplier 2=Mouser, Supplier Part Number 2=490-PJ-002A, Termination="Through Hole"
R1: library part RESC0402-82R0-1pct, "RES 82 OHM 1% 1/16W 0402", Manufacturer 1=Yageo, Manufacturer 2="Stackpole Electronics", Manufacturer 3="Vishay Dale", Manufacturer 4="Panasonic Electronic Components", Manufacturer Part Number 1=RC0402FR-0782RL, Manufacturer Part Number 2=RMCF0402FT82R0, Manufacturer Part Number 3=CRCW040282R0FKED, Manufacturer Part Number 4=ERJ-2RKF82R0X, Ohms=82, Part Number=RESC0402-82R0-1pct
R2: library part RESC0402-100R-1pct, "RES 100 OHM 1% 1/16W 0402", Manufacturer 1=Yageo, Manufacturer 2="Stackpole Electronics", Manufacturer 3="Vishay Dale", Manufacturer 4="Panasonic Electronic Components", Manufacturer Part Number 1=RC0402FR-07100RL, Manufacturer Part Number 2=RMCF0402FT100R, Manufacturer Part Number 3=CRCW0402100RFKED, Manufacturer Part Number 4=ERJ-2RKF1000X, Ohms=100, Part Number=RESC0402-100R-1pct
R3: library part RESC0402-1M60-1pct, "RES 1.60M OHM 1% 1/16W 0402", Manufacturer 1=Yageo, Manufacturer 2="Stackpole Electronics", Manufacturer 3="Vishay Dale", Manufacturer 4="Panasonic Electronic Components", Manufacturer Part Number 1=RC0402FR-071M6L, Manufacturer Part Number 2=RMCF0402FT1M60, Manufacturer Part Number 3=CRCW04021M60FKED, Ohms=1600000, Part Number=RESC0402-1M60-1pct
R4 R5: library part RESC0402-200K-1pct, "RES 200K OHM 1% 1/16W 0402", Manufacturer 1=Yageo, Manufacturer 2="Stackpole Electronics", Manufacturer 3="Vishay Dale", Manufacturer 4="Panasonic Electronic Components", Manufacturer Part Number 1=RC0402FR-07200KL, Manufacturer Part Number 2=RMCF0402FT200K, Manufacturer Part Number 3=CRCW0402200KFKED, Manufacturer Part Number 4=ERJ-2RKF2003X, Ohms=200000, Part Number=RESC0402-200K-1pct
R6: library part RESC0402-976K-1pct, "RES 976K OHM 1% 1/16W 0402", Manufacturer 1=Yageo, Manufacturer 2="Stackpole Electronics", Manufacturer 3="Vishay Dale", Manufacturer 4="Panasonic Electronic Components", Manufacturer Part Number 1=RC0402FR-07976KL, Manufacturer Part Number 2=RMCF0402FT976K, Manufacturer Part Number 3=CRCW0402976KFKED, Manufacturer Part Number 4=ERJ-2RKF9763X, Ohms=976000, Part Number=RESC0402-976K-1pct
R7: library part RESC0402-953K-1pct, "RES 953K OHM 1% 1/16W 0402", Manufacturer 1=Yageo, Manufacturer 2="Stackpole Electronics", Manufacturer 3="Vishay Dale", Manufacturer 4="Panasonic Electronic Components", Manufacturer Part Number 1=RC0402FR-07953KL, Manufacturer Part Number 2=RMCF0402FT953K, Manufacturer Part Number 3=CRCW0402953KFKED, Manufacturer Part Number 4=ERJ-2RKF9533X, Ohms=953000, Part Number=RESC0402-953K-1pct
R8: library part RESC0402-66K5-1pct, "RES 66.5K OHM 1% 1/16W 0402", Manufacturer 1=Yageo, Manufacturer 2="Stackpole Electronics", Manufacturer 3="Vishay Dale", Manufacturer 4="Panasonic Electronic Components", Manufacturer Part Number 1=RC0402FR-0766K5L, Manufacturer Part Number 2=RMCF0402FT66K5, Manufacturer Part Number 3=CRCW040266K5FKED, Manufacturer Part Number 4=ERJ-2RKF6652X, Ohms=66500, Part Number=RESC0402-66K5-1pct
R9: library part RESC0402-68R0-1pct, "RES 68 OHM 1% 1/16W 0402", Manufacturer 1=Yageo, Manufacturer 2="Stackpole Electronics", Manufacturer 3="Vishay Dale", Manufacturer 4="Panasonic Electronic Components", Manufacturer Part Number 1=RC0402FR-0768RL, Manufacturer Part Number 2=RMCF0402FT68R0, Manufacturer Part Number 3=CRCW040268R0FKED, Manufacturer Part Number 4=ERJ-2RKF68R0X, Ohms=68, Part Number=RESC0402-68R0-1pct
R10: library part RESC0402-10M0-1pct, "RES 10.0M OHM 1% 1/16W 0402", Manufacturer 1=Yageo, Manufacturer 2="Stackpole Electronics", Manufacturer 3="Vishay Dale", Manufacturer 4="Panasonic Electronic Components", Manufacturer Part Number 1=RC0402FR-0710ML, Manufacturer Part Number 2=RMCF0402FT10M0, Manufacturer Part Number 3=CRCW040210M0FKED, Ohms=10000000, Part Number=RESC0402-10M0-1pct
R11: library part RESC0402-51K0-1pct, "RES 51.0K OHM 1% 1/16W 0402", Manufacturer 1=Yageo, Manufacturer 2="Stackpole Electronics", Manufacturer 3="Vishay Dale", Manufacturer 4="Panasonic Electronic Components", Manufacturer Part Number 1=RC0402FR-0751KL, Manufacturer Part Number 2=RMCF0402FT51K0, Manufacturer Part Number 3=CRCW040251K0FKED, Manufacturer Part Number 4=ERJ-2RKF5102X, Ohms=51000, Part Number=RESC0402-51K0-1pct
R12: library part RESC0402-10K0-1pct, "RES 10.0K OHM 1% 1/16W 0402", Manufacturer 1=Yageo, Manufacturer 2="Stackpole Electronics", Manufacturer 3="Vishay Dale", Manufacturer 4="Panasonic Electronic Components", Manufacturer Part Number 1=RC0402FR-0710KL, Manufacturer Part Number 2=RMCF0402FT10K0, Manufacturer Part Number 3=CRCW040210K0FKED, Manufacturer Part Number 4=ERJ-2RKF1002X, Ohms=10000, Part Number=RESC0402-10K0-1pct
R13: library part RESC0402-390R-1pct, "RES 390 OHM 1% 1/16W 0402", Manufacturer 1=Yageo, Manufacturer 2="Stackpole Electronics", Manufacturer 3="Vishay Dale", Manufacturer 4="Panasonic Electronic Components", Manufacturer Part Number 1=RC0402FR-07390RL, Manufacturer Part Number 2=RMCF0402FT390R, Manufacturer Part Number 3=CRCW0402390RFKED, Manufacturer Part Number 4=ERJ-2RKF3900X, Ohms=390, Part Number=RESC0402-390R-1pct
R14: library part PVG3A102C01R00, "TRIMMER 1K OHM 0.25W J LEAD TOP", Manufacturer=Bourns, Max Power Dissipation=250mW, Resistance=1kR, Resistor Type=Cermet, Supplier Part Number 1=490-2643-6-ND, Temperature Coefficient=150ppm/°C, Tolerance=20%, ComponentLink1Description=https://datasheet.octopart.com/PVG3A102C01R00-Bourns-datasheet-154729832.pdf?src-supplier=Newark, ComponentLink1URL=https://datasheet.octopart.com/PVG3A102C01R00-Bourns-datasheet-154729832.pdf?src-supplier=Newark, ComponentLink2Description=https://datasheet.octopart.com/PVG3A102C01R00-Bourns-datasheet-82548162.pdf?src-supplier=Element14, ComponentLink2URL=https://datasheet.octopart.com/PVG3A102C01R00-Bourns-datasheet-82548162.pdf?src-supplier=Element14, ComponentLink3Description=https://www.bourns.com/docs/Product-Datasheets/pvg3.pdf?src-supplier=Digi-Key, ComponentLink3URL=https://www.bourns.com/docs/Product-Datasheets/pvg3.pdf?src-supplier=Digi-Key, ComponentLink4Description=http://www.bourns.com/docs/Product-Datasheets/pvg3.pdf?src-supplier=Digi-Key, ComponentLink4URL=http://www.bourns.com/docs/Product-Datasheets/pvg3.pdf?src-supplier=Digi-Key, ComponentLink5Description=https://www.mouser.com/ds/2/54/vg3-1084610.pdf?src-supplier=Mouser, ComponentLink5URL=https://www.mouser.com/ds/2/54/vg3-1084610.pdf?src-supplier=Mouser, Height=0.079inch, Manufacturer Part Number=PVG3A102C01R00, Mount="Surface Mount", Number of Turns=1, Packaging="Cut Tape", Pricing 1="1=1.44, 10=1.273, 25=1.1452, 50=1.103, 100=1.0605, 250=0.99688, 500=0.8484 (USD)", Stock 1=4867, Supplier 1=Digi-Key, Supplier 2=Mouser, Supplier Part Number 2=81-PVG3A102C01R00
R15: library part RESC0402-2K00-1pct, "RES 2.00K OHM 1% 1/16W 0402", Manufacturer 1=Yageo, Manufacturer 2="Stackpole Electronics", Manufacturer 3="Vishay Dale", Manufacturer 4="Panasonic Electronic Components", Manufacturer Part Number 1=RC0402FR-072KL, Manufacturer Part Number 2=RMCF0402FT2K00, Manufacturer Part Number 3=CRCW04022K00FKED, Manufacturer Part Number 4=ERJ-2RKF2001X, Ohms=2000, Part Number=RESC0402-2K00-1pct
R16: library part RESC0402-17K8-1pct, "RES 17.8K OHM 1% 1/16W 0402", Manufacturer 1=Yageo, Manufacturer 2="Stackpole Electronics", Manufacturer 3="Vishay Dale", Manufacturer 4="Panasonic Electronic Components", Manufacturer Part Number 1=RC0402FR-0717K8L, Manufacturer Part Number 2=RMCF0402FT17K8, Manufacturer Part Number 3=CRCW040217K8FKED, Manufacturer Part Number 4=ERJ-2RKF1782X, Ohms=17800, Part Number=RESC0402-17K8-1pct
R17 R18: library part RESC0402-1K00-1pct, "RES 1.00K OHM 1% 1/16W 0402", Manufacturer 1=Yageo, Manufacturer 2="Stackpole Electronics", Manufacturer 3="Vishay Dale", Manufacturer 4="Panasonic Electronic Components", Manufacturer Part Number 1=RC0402FR-071KL, Manufacturer Part Number 2=RMCF0402FT1K00, Manufacturer Part Number 3=CRCW04021K00FKED, Manufacturer Part Number 4=ERJ-2RKF1001X, Ohms=1000, Part Number=RESC0402-1K00-1pct
R19: library part RESC0402-49R9-1pct, "RES 49.9 OHM 1% 1/16W 0402", Manufacturer 1=Yageo, Manufacturer 2="Stackpole Electronics", Manufacturer 3="Vishay Dale", Manufacturer 4="Panasonic Electronic Components", Manufacturer Part Number 1=RC0402FR-0749R9L, Manufacturer Part Number 2=RMCF0402FT49R9, Manufacturer Part Number 3=CRCW040249R9FKED, Manufacturer Part Number 4=ERJ-2RKF49R9X, Ohms=49.9, Part Number=RESC0402-49R9-1pct
R20: library part RESC0402-41K2-1pct, "RES 41.2K OHM 1% 1/16W 0402", Manufacturer 1=Yageo, Manufacturer 2="Stackpole Electronics", Manufacturer 3="Vishay Dale", Manufacturer 4="Panasonic Electronic Components", Manufacturer Part Number 1=RC0402FR-0741K2L, Manufacturer Part Number 2=RMCF0402FT41K2, Manufacturer Part Number 3=CRCW040241K2FKED, Manufacturer Part Number 4=ERJ-2RKF4122X, Ohms=41200, Part Number=RESC0402-41K2-1pct
R21: library part RESC0402-91K0-1pct, "RES 91.0K OHM 1% 1/16W 0402", Manufacturer 1=Yageo, Manufacturer 2="Stackpole Electronics", Manufacturer 3="Vishay Dale", Manufacturer 4="Panasonic Electronic Components", Manufacturer Part Number 1=RC0402FR-0791KL, Manufacturer Part Number 2=RMCF0402FT91K0, Manufacturer Part Number 3=CRCW040291K0FKED, Manufacturer Part Number 4=ERJ-2RKF9102X, Ohms=91000, Part Number=RESC0402-91K0-1pct
R22: library part RESC0402-10K2-1pct, "RES 10.2K OHM 1% 1/16W 0402", Manufacturer 1=Yageo, Manufacturer 2="Stackpole Electronics", Manufacturer 3="Vishay Dale", Manufacturer 4="Panasonic Electronic Components", Manufacturer Part Number 1=RC0402FR-0710K2L, Manufacturer Part Number 2=RMCF0402FT10K2, Manufacturer Part Number 3=CRCW040210K2FKED, Manufacturer Part Number 4=ERJ-2RKF1022X, Ohms=10200, Part Number=RESC0402-10K2-1pct
R23: library part RESC0402-18K0-1pct, "RES 18.0K OHM 1% 1/16W 0402", Manufacturer 1=Yageo, Manufacturer 2="Stackpole Electronics", Manufacturer 3="Vishay Dale", Manufacturer 4="Panasonic Electronic Components", Manufacturer Part Number 1=RC0402FR-0718KL, Manufacturer Part Number 2=RMCF0402FT18K0, Manufacturer Part Number 3=CRCW040218K0FKED, Manufacturer Part Number 4=ERJ-2RKF1802X, Ohms=18000, Part Number=RESC0402-18K0-1pct
R24: library part RESC0603-3K00-1pct, "RES 3.00K OHM 1% 1/10W 0603", Manufacturer 1=Yageo, Manufacturer 2="Stackpole Electronics", Manufacturer 3="Vishay Dale", Manufacturer 4="Panasonic Electronic Components", Manufacturer Part Number 1=RC0603FR-073KL, Manufacturer Part Number 2=RMCF0603FT3K00, Manufacturer Part Number 3=CRCW06033K00FKEA, Manufacturer Part Number 4=ERJ-3EKF3001V, Ohms=3000, Part Number=RESC0603-3K00-1pct
U1: library part BUF802IRGTR, "WIDE-BANDWIDTH JFET BUFFER", Manufacturer="Texas Instruments", Supplier Part Number 1=296-BUF802IRGTRCT-ND, Manufacturer Part Number=BUF802IRGTR, Pricing 1="1=5.06, 10=4.541, 25=4.2928, 100=3.7206, 250=3.5298, 500=3.16728, 1000=2.88 (USD)", Stock 1=1253, Supplier 1=Digi-Key, Supplier 2=Mouser, Supplier Part Number 2=595-BUF802IRGTR
U2: library part ADA4625-1ARDZ, "IC OPAMP JFET 8SOIC", Input Bias Current=15pA, Input Offset Voltage (Vos)=15uV, Manufacturer="Analog Devices", Max Operating Temperature=125°C, Min Operating Temperature=-40°C, Operating Supply Current=4mA, Output Current per Channel=33mA, Supplier Part Number 1=505-ADA4625-1ARDZ-ND, -3db Bandwidth=16MHz, ComponentLink1Description=https://www.analog.com/media/en/technical-documentation/data-sheets/ADA4625-1.pdf?src-supplier=Digi-Key, ComponentLink1URL=https://www.analog.com/media/en/technical-documentation/data-sheets/ADA4625-1.pdf?src-supplier=Digi-Key, Gain Bandwidth Product=18MHz, Manufacturer Part Number=ADA4625-1ARDZ, Mount="Surface Mount", Number of Circuits=1, Number of Pins=8, Packaging=Rail/Tube, Pricing 1="1=12.08, 10=10.916, 25=10.4088, 100=9.0378, 250=8.6316, 500=7.86996, 1000=7.185 (USD)", RoHS Compliant=Yes, Series=-, Slew Rate=48V/µs, Stock 1=2217, Supplier 1=Digi-Key, Supplier 2=Mouser, Supplier Part Number 2=584-ADA4625-1ARDZ
U3: library part TPS7A3901DSCR, "IC REG LINEAR POS/NEG ADJ 10WSON", Dropout Voltage=500mV, Manufacturer="Texas Instruments", Max Input Voltage=33V, Max Operating Temperature=125°C, Max Output Voltage=-30V, Max Supply Current=904uA, Min Operating Temperature=-40°C, Min Output Voltage=0V, Output Current=150mA, Power Supply Rejection Ratio (PSRR)=69dB, Quiescent Current=150uA, Supplier Part Number 1=296-TPS7A3901DSCRCT-ND, ComponentLink1Description=http://www.ti.com/lit/ds/symlink/tps7a39.pdf?src-supplier=Digi-Key, ComponentLink1URL=http://www.ti.com/lit/ds/symlink/tps7a39.pdf?src-supplier=Digi-Key, ComponentLink2Description=http://www.ti.com/general/docs/suppproductinfo.tsp?distId=10&amp;gotoUrl=http%3A%2F%2Fwww.ti.com%2Flit%2Fgpn%2Ftps7a39&src-supplier=Digi-Key, ComponentLink2URL=http://www.ti.com/general/docs/suppproductinfo.tsp?distId=10&amp;gotoUrl=http%3A%2F%2Fwww.ti.com%2Flit%2Fgpn%2Ftps7a39&src-supplier=Digi-Key, Copyright="Copyright (C) 2022 Ultra Librarian. All rights reserved.", Manufacturer_Part_Number=TPS7A3901DSCR, Manufacturer Part Number=TPS7A3901DSCR, Mfr_Name="Texas Instruments", Mount="Surface Mount", Number of Regulators=2, Output Type=Adjustable, Packaging="Cut Tape", RefDes=RefDes, Series=-, Stock 1=0, Supplier 1=Digi-Key, Supplier 2=Mouser, Supplier Part Number 2=595-TPS7A3901DSCR, Type=DEV
U4: library part LTC3261EMSE, "IC REG CHARG PUMP INV 12MSOP", Case/Package=SOP, Manufacturer="Analog Devices / Linear Technology", Manufacturer_Part_Number=ltc3261emse#pbf, Manufacturer Part Number=LTC3261EMSE#TRPBF, Max Input Voltage=32V, Max Operating Temperature=125°C, Max Output Current=100mA, Mfr_Name="Linear Technology", Min Input Voltage=4.5V, Min Operating Temperature=-40°C, Operating Supply Current=60uA, Output Voltage=-32V, Package Quantity=2500, Supplier Part Number 1=LTC3261EMSE#TRPBFCT-ND, Switching Frequency=500kHz, ComponentLink1Description=http://components.arrow.com/part/dataview/53470050S89425N7433?src-supplier=Arrow+Electronics, ComponentLink1URL=http://components.arrow.com/part/dataview/53470050S89425N7433?src-supplier=Arrow+Electronics, ComponentLink2Description=http://cds.linear.com/docs/en/datasheet/3261fb.pdf?src-supplier=Digi-Key, ComponentLink2URL=http://cds.linear.com/docs/en/datasheet/3261fb.pdf?src-supplier=Digi-Key, ComponentLink3Description=http://www.linear.com/docs/44087?src-supplier=Digi-Key, ComponentLink3URL=http://www.linear.com/docs/44087?src-supplier=Digi-Key, Copyright="Copyright (C) 2022 Ultra Librarian. All rights reserved.", Lead Free="Lead Free", Max Supply Voltage=32V, Min Supply Voltage=4.5V, Number of Outputs=1, Number of Pins=12, Output Current=100mA, Output Type=Adjustable, Packaging="Tape and Reel", RefDes=RefDes, RoHS Compliant=Yes, Series=-, Stock 1=0, Supplier 1=Digi-Key, Supplier 2=Mouser, Supplier 3=Newark, Supplier Part Number 2=584-LTC3261EMSETRPBF, Supplier Part Number 3=50AK2864, Synchronous Rectifier=No, Type=DEV

## Via types
v1: diameter 18, hole 10, Top to Bottom, tented both sides, 214 vias

## Nets (pads, with @x,y where several pads share a name; then routed paths per layer and width w, separated by ;. In a path a pad name is that pad's centre, name@x,y a point inside that pad or via, vN(x,y) a via of type N, cw(c..) or ccw(c..) an arc to the next point about the centre after c; other vN are vias at no path point)
GND: C3.2 C7.2 C8.2 C9.1 C10.2 C11.1 C12.2 C13.1 C14.2 C15.1 C16.2 C17.1 C18.2 C19.1 C20.2 C21.1 C22.2 C23.2 D2.2 J2.1 J3.2 J4.2 J4.3 R5.2 R8.2 R13.2 R14.3 R22.2 U1.17 U3.4 U3.11 U4.2 U4.11 U4.EPAD | length 70.6
  Top w7.87: U3.4 U3.11@1825.79,228.35
  Top w25: v1@391.44,431.4 R5.2
  other v1: 921.26,33.46 1059.06,33.46 1196.85,33.46 1334.65,33.46 1472.44,33.46 1610.24,33.46 1748.03,33.46 1885.83,33.46 2023.62,33.46 2299.21,33.46 2437.01,33.46 2574.8,33.46 2712.6,33.46 2850.39,33.46 791.34,39.37 937.01,71.85 791.34,78.74 2035.43,93.5 1803.15,99.41 1887.8,99.41 973.43,109.25 594.49,118.11 633.86,118.11 673.23,118.11 712.6,118.11 751.97,118.11 791.34,118.11 2035.43,134.84 1803.15,140.75 1887.8,140.75 566.65,145.95 576.77,171.26 714.57,171.26 990.16,171.26 1127.95,171.26 1265.75,171.26 1403.54,171.26 2781.5,171.26 2919.29,171.26 538.81,173.79 510.97,201.63 677.85,203.74 1152.56,214.57 483.13,229.47 649.61,232.28 1681.1,239.17 1290.35,244.49 1319.88,244.49 1349.41,244.49 1378.94,244.49 1822.83,248.11 1868.11,248.03 1189.96,252.95 455.29,257.3 2143.7,269.68 427.45,285.14 507.87,309.06 645.67,309.06 1334.65,309.06 1472.44,309.06 1610.24,309.06 2143.7,309.06 2574.8,309.06 2712.6,309.06 2850.39,309.06 399.62,312.98 371.78,340.82 2030.51,343.5 511.81,354.33 784.45,354.33 1803.15,355.31 1887.8,355.32 1510.83,355.91 1540.35,355.91 1569.88,355.91 1599.41,355.91 343.94,368.66 511.81,393.7 784.45,393.7 316.1,396.5 1803.15,396.65 1887.8,396.65 1202.76,428.15 354.33,433.07 393.7,433.07 433.07,433.07 472.44,433.07 511.81,433.07 784.45,433.07 2017.72,443.9 1127.95,446.85 1679.13,446.85 2505.91,446.85 2643.7,446.85 980.32,462.6 511.81,472.44 551.18,472.44 2017.72,485.24 980.32,505.91 651.57,531.49 882.54,559.01 948.76,574.48 1016.76,574.48 1084.76,574.48 1152.76,574.48 1220.76,574.48 1288.76,574.48 1356.76,574.48 1424.76,574.48 1492.76,574.48 1560.76,574.48 1628.76,574.48 1696.76,574.48 1764.76,574.48 1832.76,574.48 1900.76,574.48 1968.76,574.48 2036.76,574.48 2104.76,574.48 2172.76,574.48 2240.76,574.48 2308.76,574.48 2376.76,574.48 2444.76,574.48 2512.76,574.48 2580.76,574.48 2648.76,574.48 2716.76,574.48 2784.76,574.48 2852.76,574.48 2920.76,574.48 783.46,584.65 511.81,590.55 551.18,590.55 841.4,597.62 511.81,629.92 789.68,629.92 924.46,630.24 992.46,630.24 1060.46,630.24 1128.46,630.24 1196.46,630.24 1264.46,630.24 1332.46,630.24 1400.46,630.24 1468.46,630.24 1536.46,630.24 1604.46,630.24 1672.46,630.24 1740.46,630.24 1808.46,630.24 1876.46,630.24 1944.46,630.24 2012.46,630.24 2080.46,630.24 2148.46,630.24 2216.46,630.24 2284.46,630.24 2352.46,630.24 2420.46,630.24 2488.46,630.24 2556.46,630.24 2624.46,630.24 2692.46,630.24 2760.46,630.24 2828.46,630.24 2896.46,630.24 2964.46,630.24 511.81,669.29 789.68,669.29 511.81,708.66 789.68,708.66 511.81,748.03 551.18,748.03 750.32,748.03 789.68,748.03
GUARD: C1.1 R3.2 R4.1 | length 138.1
  Top w7.87: R3.2 v1(350.69,582.68)
  Top w25: R4.1 C1.1
  Top w27.56: R3.2@354.33,553.15 C1.1@387.8,553.15
  Ground w7.87: 318.9,582.68 v1(350.69,582.68)
NetC1_2: C1.2 R2.1 | length 34.4
  Top w27.56: C1.2@432.09,553.15 R2.1@466.54,553.15
NetC2_1: C2.1 R11.1 R12.1 U2.1 U2.2 | length 293.9
  Top w7.87: R11.1 R12.1 C2.1 830.71,457.97 U2.2@830.71,276.57 ; U2.1@835.33,333.86 U2.1
NetC2_2: C2.2 R15.2 U2.6 | length 334.7
  Top w8: C2.2 874.7,461.22 R15.2 874.7,387.11 1027.95,233.86 U2.6
NetC3_1: C3.1 R15.1 U1.4 | length 470
  Top w7.87: C3.1 914.07,420.67 R15.1 v1(940.94,419.29)
  Top w8: v1(593.82,473.74) U1.4@593.82,501.95
  Signal/Power w7.87: 786.58,473.74 886.5,473.74 v1(940.94,419.29)
  Signal/Power w8: v1(593.82,473.74) 786.58,473.74
NetC4_1: C4.1 R20.2 R22.1 U3.9 | length 133.5
  Top w7.87: U3.9 2021.95,267.72 R22.1
NetC5_1: C5.1 U4.7 U4.8 | length 150
  Top w9.84: U4.8 2182.1,353.35 C5.1@2310.04,353.35
NetC5_2: C5.2 U4.5 U4.6 | length 150.9
  Top w9.84: U4.5 2182.1,225.39 C5.2@2311.02,225.39
NetC6_1: C6.1 R21.1 R23.1 U3.7 | length 133.5
  Top w6: U3.7 R21.1@1978.64,228.35 ; R21.1@1986.22,208.66 2030.51,208.66 R23.1
NetC7_1: C7.1 U3.3 | length 46
  Top w7.87: C7.1 1756.89,248.03 U3.3
NetD1_1: D1.1 J4.1 | length 282.1
  Top w19.68: D1.1 2417.32,427.17 2433.07,411.42 J4.1
NetD2_1: D2.1 R24.2 | length 67.7
  Top w7.87: D2.1 R24.2
NetJ3_1: J3.1 R19.2 | length 2106
  Top w16.69: R19.2 825.72,549.21 ccw(c825.72,566.02) 837.59,554.13 859.61,576.15 cw(c922.9,512.86) 922.9,602.36 J3.1
NetR1_2: R1.2 R3.1 R6.1 | length 43.3
  Top w25: R6.1 R3.1
NetR2_2: R2.2 R10.1 U1.2 | length 131.6
  Top w7.87: R2.2 539.47,553.15 cw(c539.47,529.63) 556.1,546.26 557.09,545.28 ; 557.09,545.27 ccw(c566.6,554.79) 566.6,541.33 U1.2
  Top w25: R10.1 R2.2
NetR4_2: R4.2 R5.1 | length 43.3
  Top w25: R5.1 R4.2
NetR6_2: R6.2 R7.1 | length 43.3
  Top w25: R7.1 R6.2
NetR7_2: R7.2 R8.1 R9.1 | length 573.4
  Top w7.87: v1(312.7,437.3) R7.2 ; v1(715.85,258.56) R8.1 R9.1
  Signal/Power w7.87: v1(312.7,437.3) 491.44,258.56 v1(715.85,258.56)
NetR9_2: R9.2 U2.3 | length 63.3
  Top w7.87: R9.2 855.71,232.28 U2.3
NetR10_2: R10.2 U1.3 | length 53.8
  Top w7.87: R10.2 cw(c558.36,509.84) 558.36,521.64 U1.3
NetR11_2: R11.2 R19.1 U1.11 | length 93.7
  Top w7.87: U1.11@709.82,541.33 749.03,541.33 756.91,549.21 R11.2@756.91,505.91
NetR12_2: R12.2 R13.1 R14.1 R14.2 | length 386.7
  Top w8: R12.2 R13.1 914.07,526.28 924.21,536.42 1012.8,536.42 1039.37,509.84 R14.2 1079.72,473.43 1125,518.7 R14.1
NetR16_1: R16.1 U1.7 | length 47.5
  Top w7.87: U1.7 661.42,426.42 661.66,426.18 R16.1@661.73,426.18
NetR17_1: R17.1 U1.15 U1.16
NetR18_1: R18.1 U1.13 U1.14
NetR23_2: R23.2 U3.8 | length 139.8
  Top w7.87: U3.8 2040.35,248.03
TIP: J1.1 R1.1
V+: C20.1 C22.1 D1.3 U3.1 U3.2 U4.9 U4.10 | length 697.1
  Top w15.75: C20.1 v1(1719.49,427.17) ; C22.1 2139.76,465.55 v1(2139.76,514.76)
  Top w19.68: C22.1 D1.3
  Signal/Power w15.75: v1(1719.49,427.17) 1807.09,514.76 v1(2139.76,514.76)
V-: C21.2 C23.1 U3.5 U4.4 | length 680.4
  Top w15.75: v1(1719.49,67.91) C21.2 ; C23.1 v1(2197.83,114.17) ; C23.1 U4.4
  Signal/Power w15.75: v1(1719.49,67.91) 1719.77,67.63 2151.29,67.63 v1(2197.83,114.17)
VDD: C4.2 C8.1 C10.1 C12.1 C14.1 C16.1 C18.1 R17.2 R20.1 R24.1 U1.1 U1.12 U2.7 U2.8 U3.10 | length 33.9
  Top w8: R24.1 v1(1118.11,717.52)
  other v1: 1189.96,323.82 1943.9,343.5 1987.2,343.5 1290.35,355.91 1319.88,355.91 1349.41,355.91 1378.94,355.91 1152.56,361.22 629.92,708.66 590.55,748.03 629.92,748.03 669.29,748.03 708.66,748.03
VSS: C6.2 C9.2 C11.2 C13.2 C15.2 C17.2 C19.2 R16.2 R18.2 R21.2 U1.5 U1.6 U1.8 U1.9 U1.10 U2.4 U3.6 | length 341.9
  Top w8: R18.2 v1(673.23,702.76)
  Bottom w8: v1(673.23,702.76) 688.98,687.01 v1(688.98,393.7)
  other v1: 866.14,71.85 827.76,109.25 1943.9,152.56 1987.2,152.56 1510.83,244.49 1540.35,244.49 1569.88,244.49 1599.41,244.49 614.17,354.33 649.61,354.33 688.98,354.33 614.17,393.7 614.17,433.07
pads on no net: D1.2 U2.5 U4.1 U4.3 U4.12

## Polygon pours and split planes (outlines as drawn)
GND on Top "GND_L01_P049" (solid, pour order 49): 495.39,444.88 232.28,444.88 232.28,0 3149.61,0 3149.61,787.4 495.39,787.4
VSS on Top "VSS_L01_P035" (solid, pour order 35): 573.82,526.57 729.33,526.57 729.33,337.6 573.82,337.6